# Altium PCB echOpen_HV+Pulser_Board.PcbDoc
Units mil, origin at the board's own origin, x right, y up, seen from the top; angles counter-clockwise.
Board outline 1402 x 3250 mil, 4 copper layers (Top, Plane 1, Plane 2, Bottom), stack 59.292 mil thick; 31 components, 14 nets, 112 pads, 196 vias.
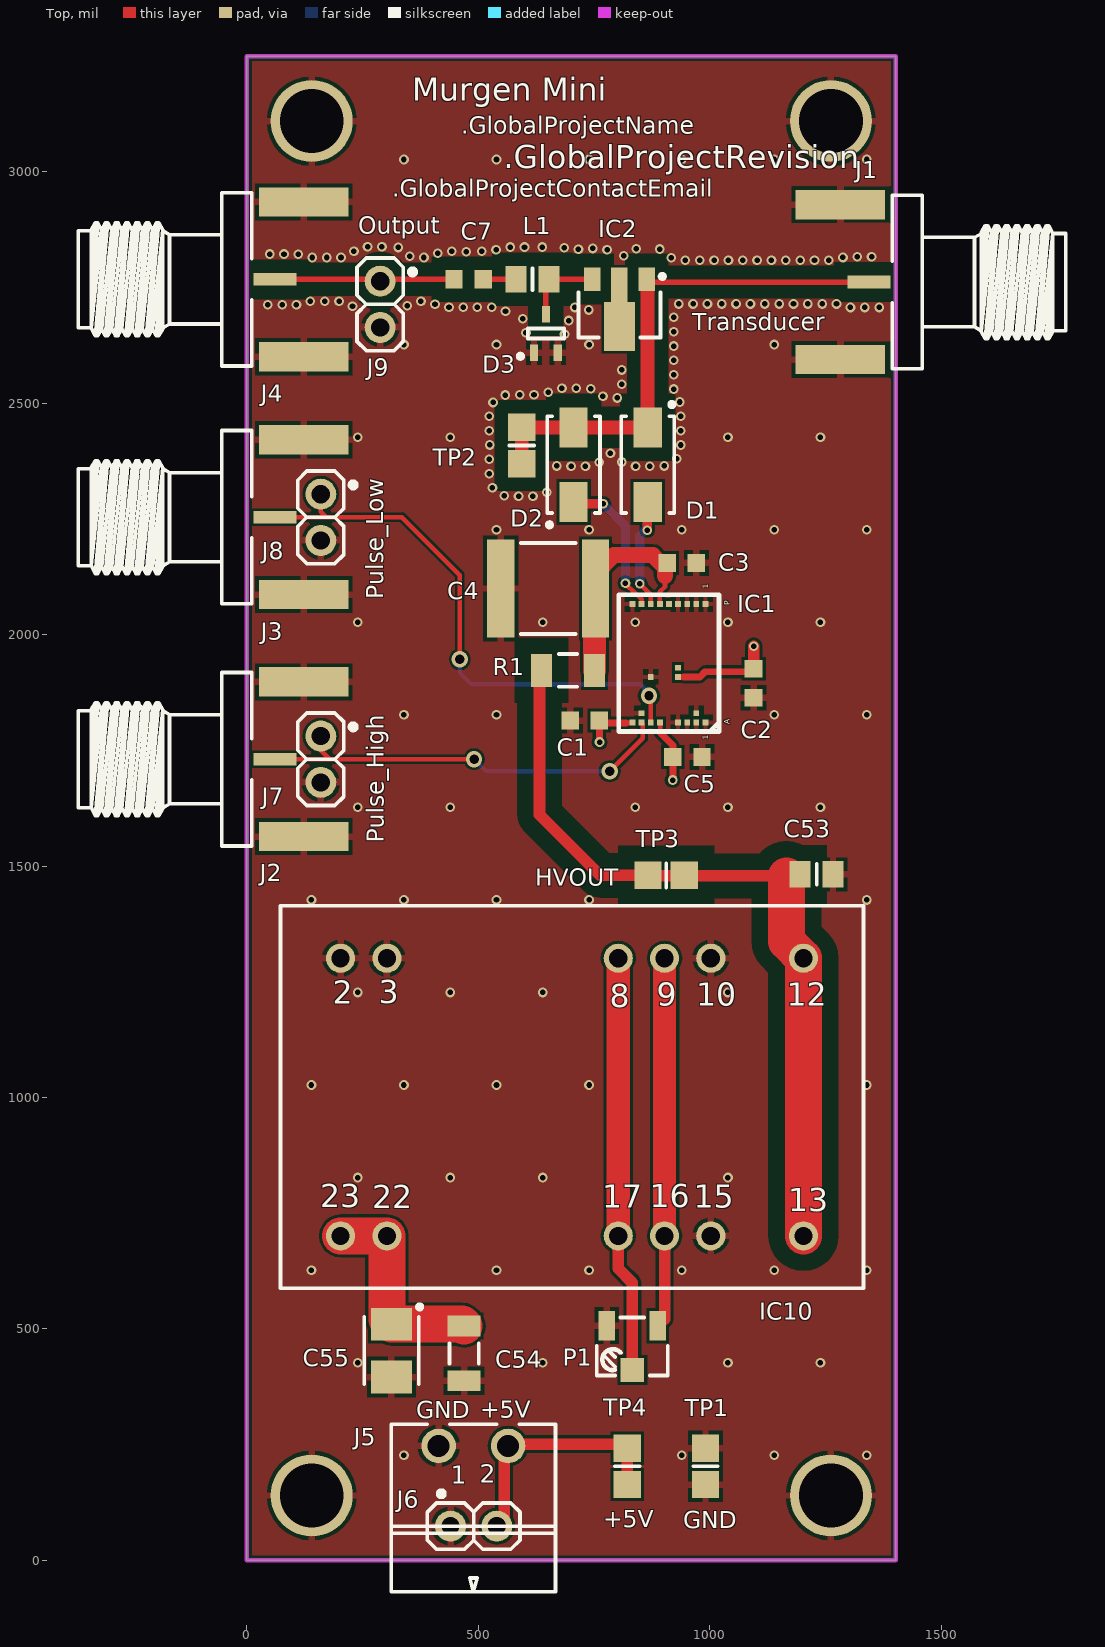
[diagram p0: Top view]
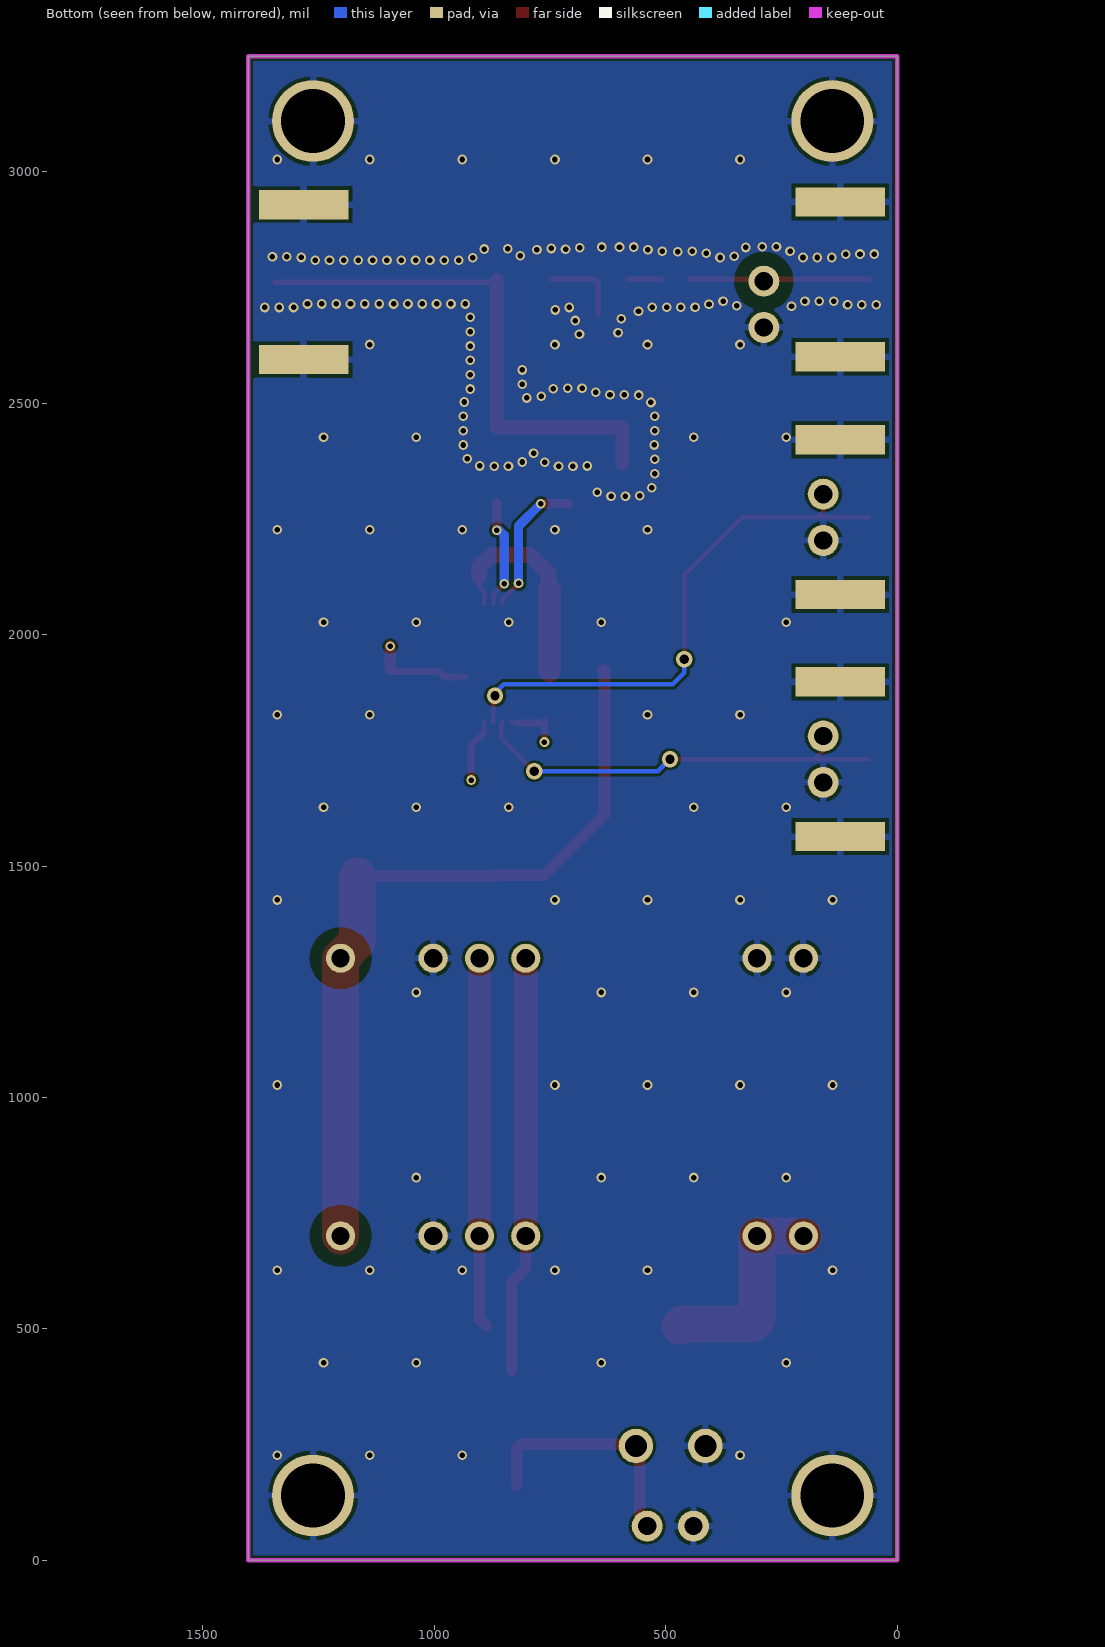
[diagram p1: Bottom view, seen from below]
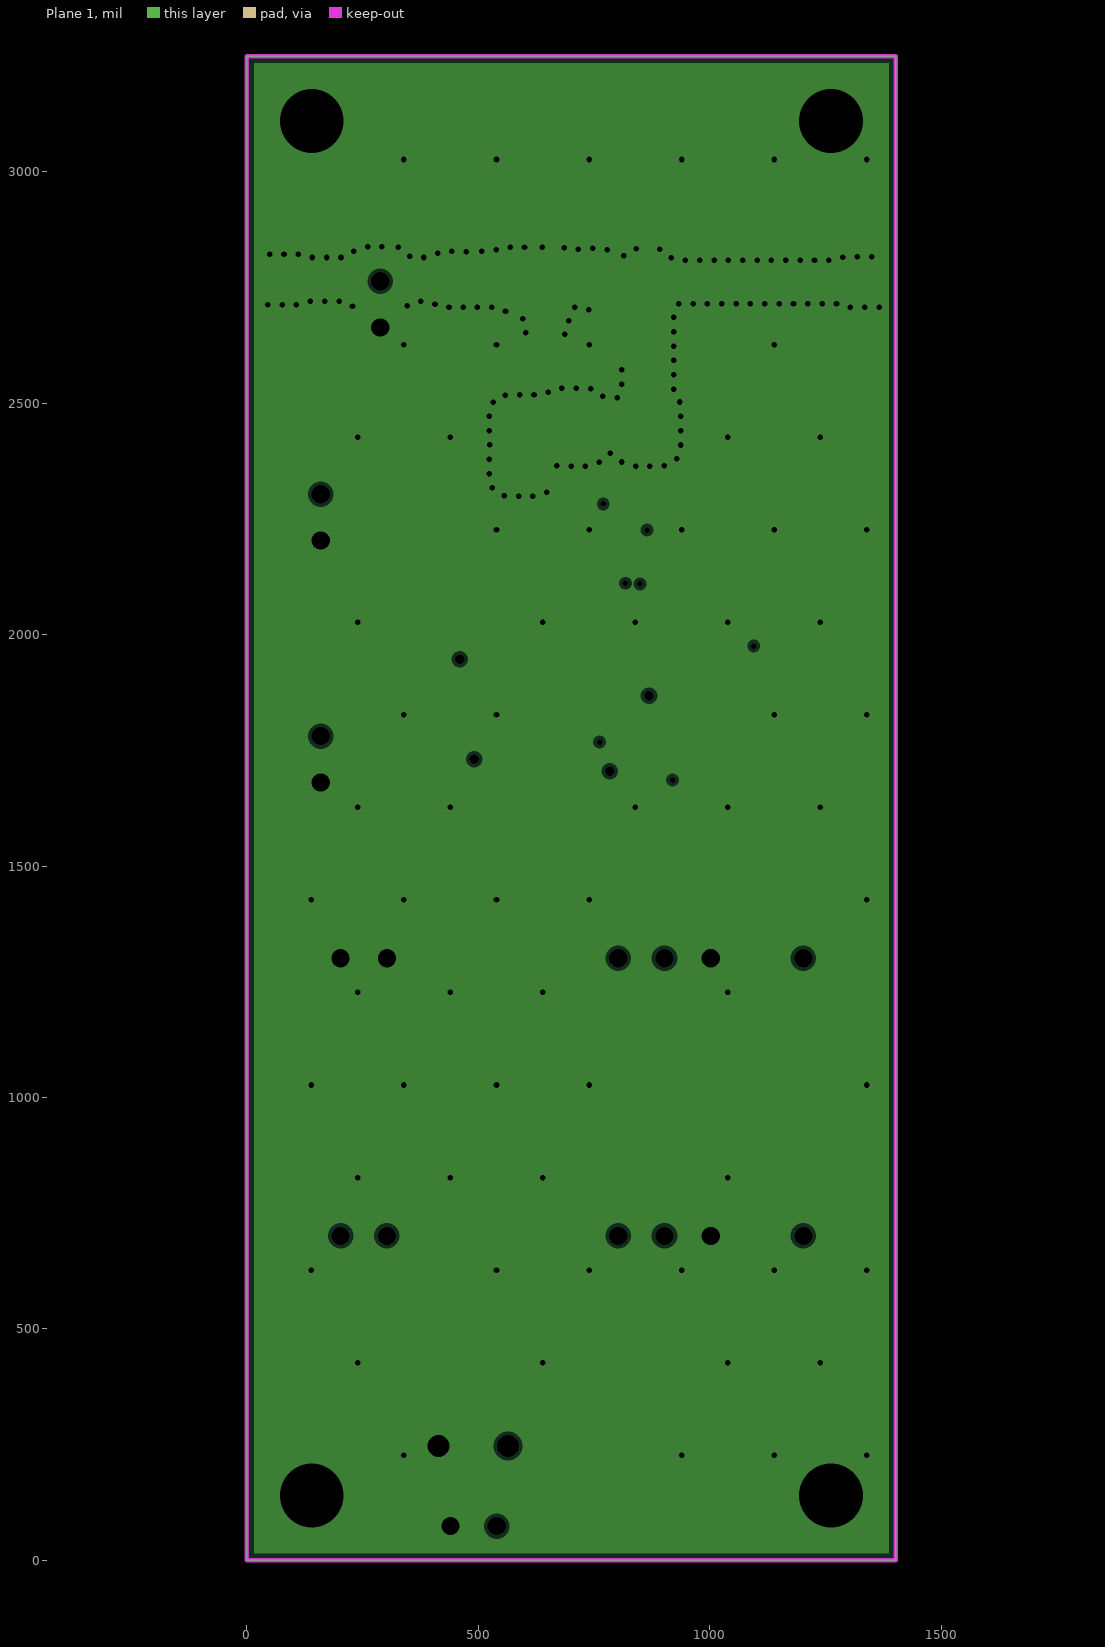
[diagram p2: Plane 1, clearances drawn from the general rule]
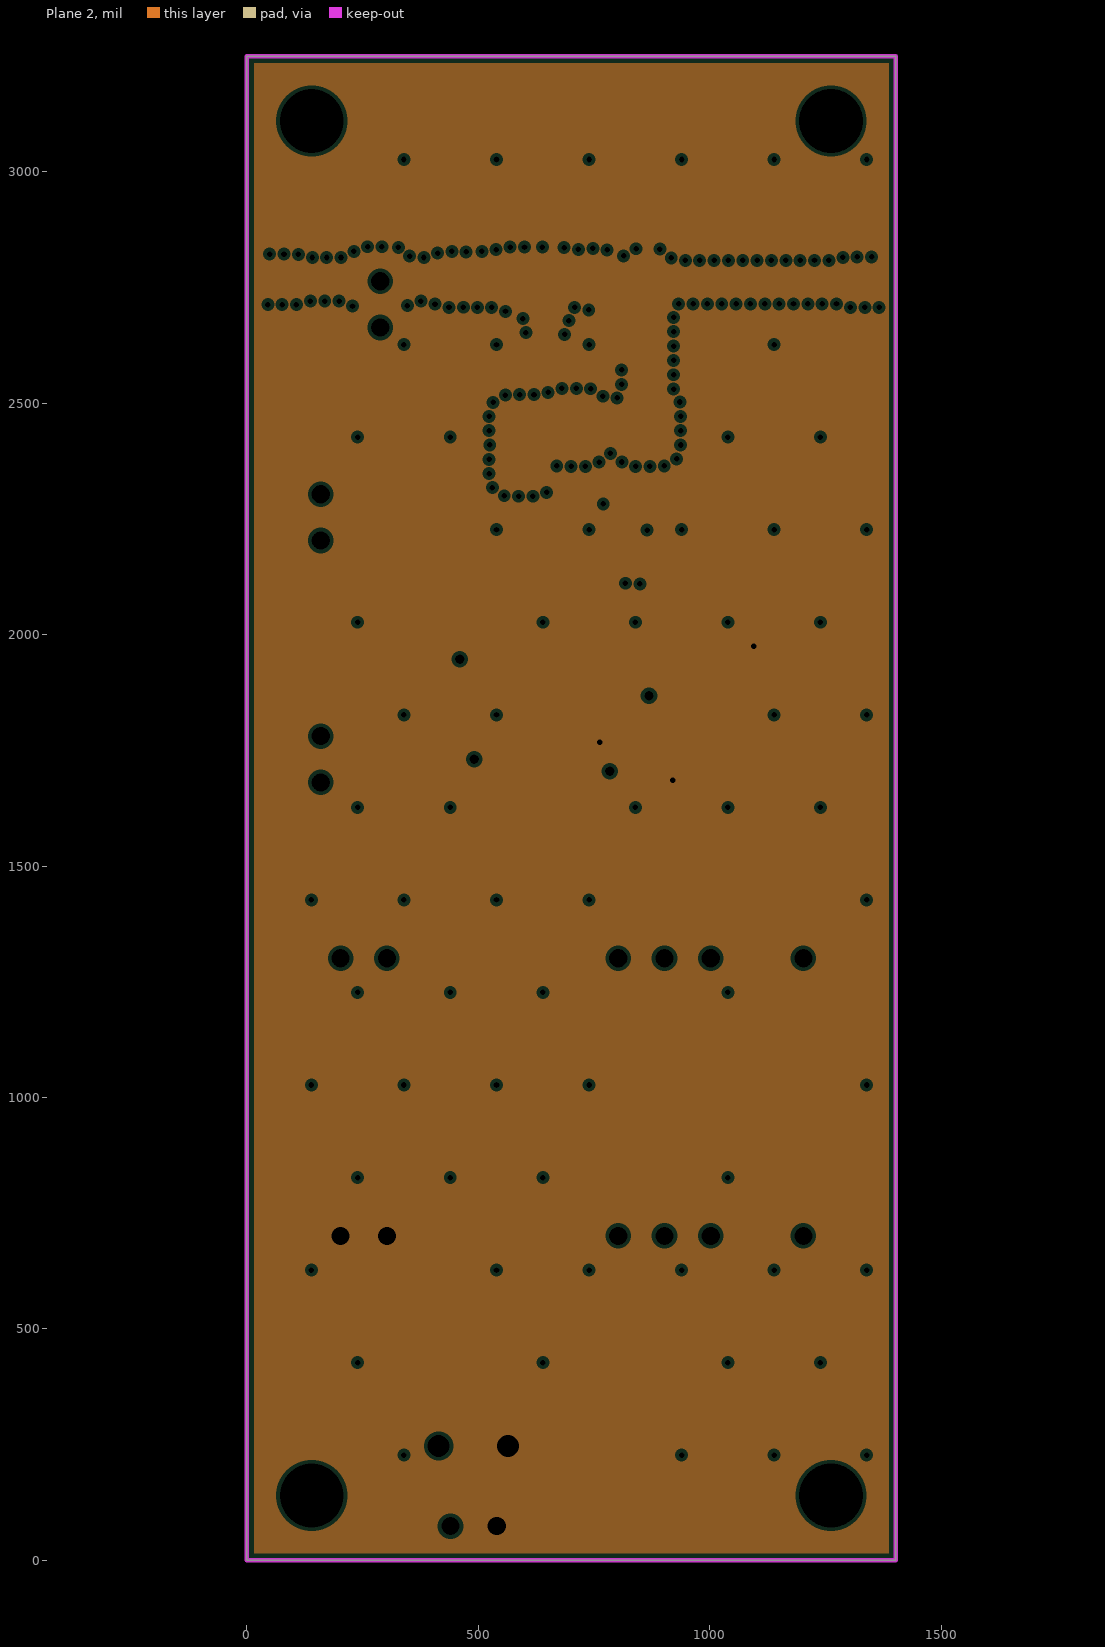
[diagram p3: Plane 2, clearances drawn from the general rule]
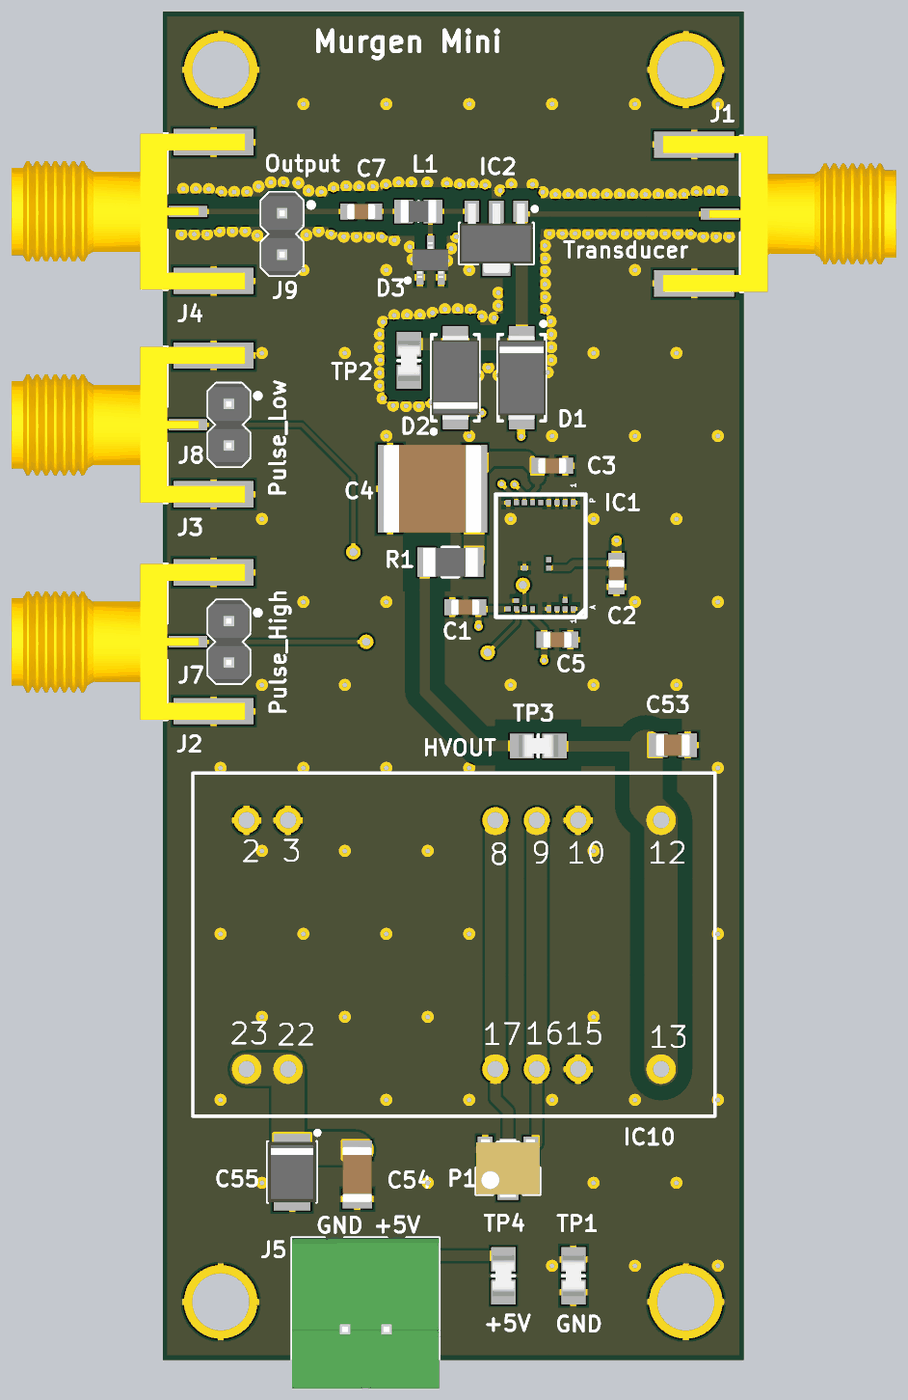
[diagram p4: 3D render of the assembled board from above, using the file's embedded part models]

## Layer stack, top to bottom
Top Solder: solder mask 0.4, Solder Resist, Dk 3.5
Top: signal copper 1.378
Dielectric1: core 7.874, FR-4, Dk 4.8
Plane 1: plane copper 0.709, net AGND
Dielectric2: prepreg 39.37, FR-4, Dk 4.8
Plane 2: plane copper 0.709, net VDD_5V
Dielectric3: core 7.874, FR-4, Dk 4.8
Bottom: signal copper 1.378
Bottom Solder: solder mask 0.4, Solder Resist, Dk 3.5

## Board outline
0,0 1402,0 1402,3250 0,3250

## Design rules (kind name [scope] priority, off if disabled: settings)
AssemblyTestPointUsage [All] p1 off:
AssemblyTestpoint [All] p1 off: testpointundercomponent=TRUE minsize=40 maxsize=100 preferedsize=60 minholesize=0 maxholesize=40 preferedholesize=32 testpointgrid=1 usegrid=TRUE gridtolerance=0.01 allowsidetop=TRUE allowsidebottom=TRUE
Clearance ClearanceHV [InNet('HVOUT') vs not InComponent('C53')] p1: gap=35
Clearance ClearanceRF [InNetClass('RF') and not InComponent('IC3') vs InNet('AGND') and not InComponent('IC3')] p2: gap=30
Clearance ClearanceViaPad [IsVia vs IsPad] p3: gap=6
Clearance ClearanceGNDpolygons [InPolygonClass('GNDpolygons')] p4: gap=6
Clearance [All] p5: gap=6
ComponentClearance ComponentClearance_Connectors [HasFootprint('HARWIN_M20-9990246') vs (HasFootprint('PHOENIX_1803277') OR HasFootprint('AMPHENOL_132357-11'))] p1: gap=0 collisioncheckmode=3 verticalgap=0 showdistances=FALSE
ComponentClearance [All] p2: gap=10 collisioncheckmode=3 verticalgap=10 showdistances=TRUE
FabricationTestPointUsage [All] p1 off: valid=0 allowmultiple=FALSE
FabricationTestpoint [All] p1 off: side=3 testpointundercomponent=TRUE minsize=40 maxsize=100 preferedsize=60 minholesize=0 maxholesize=40 preferedholesize=32 testpointgrid=1 allowsidetop=TRUE allowsidebottom=TRUE usegrid=TRUE gridtolerance=0.01
HoleSize [All] p1: absolutevalues=TRUE maxlimit=248.03 minlimit=11.81 maxpercent=80.000 minpercent=20.000
HoleToHoleClearance [All] p1: gap=12 allowstackedmicrovias=TRUE
MatchedLengths MatchedLengthsBits [InNetClass('BIT[1..12]')] p1: tolerance=1000 checknetsindiffpair=FALSE checkdiffpairvsdiffpair=TRUE checkxsignals=TRUE checkothers=TRUE
MatchedLengths MatchedLengthsDs [InNetClass('D[0..11]')] p2: tolerance=1000 checknetsindiffpair=FALSE checkdiffpairvsdiffpair=TRUE checkxsignals=TRUE checkothers=TRUE
MinimumAnnularRing [All] p1: minimumring=4
MinimumSolderMaskSliver [All] p1: minsoldermaskwidth=0.5
PlaneClearance [All] p1: clearance=8
PlaneConnect PlaneConnectVia [Isvia] p1: planeconnectstyle=Direct reliefexpansion=20 reliefentries=4 reliefconductorwidth=10 reliefairgap=10
PlaneConnect [All] p2: planeconnectstyle=Relief reliefexpansion=20 reliefentries=4 reliefconductorwidth=20 reliefairgap=10
PolygonConnect PolygonConnectBGA [All vs InComponent('IC1')] p1: connectstyle=Relief reliefconductorwidth=10 reliefentries=4 polygonreliefangle="90 Angle" airgapwidth=10
PolygonConnect PolygonConnectLittleAccessPads [All vs InComponent('IC9')] p2: connectstyle=Relief reliefconductorwidth=30 reliefentries=4 polygonreliefangle="90 Angle" airgapwidth=10
PolygonConnect PolygonConnectVia [IsVia] p3: connectstyle=Direct reliefconductorwidth=15.75 reliefentries=4 polygonreliefangle="90 Angle" airgapwidth=10
PolygonConnect PolygonConnectBigPads [(ObjectKind = 'Pad') And ((AsMM(PadXSize_AllLayers) > 10) Or (AsMM(PadYSize_AllLayers) > 10))] p4: connectstyle=Direct reliefconductorwidth=15.75 reliefentries=4 polygonreliefangle="90 Angle" airgapwidth=10
PolygonConnect PolygonConnectGeneral [All] p5: connectstyle=Relief reliefconductorwidth=15 reliefentries=4 polygonreliefangle="90 Angle" airgapwidth=8
RoutingVias [All] p1: holewidth=15 width=25 viastyle="Through Hole" minholewidth=12 minwidth=16 maxholewidth=50 maxwidth=56
SilkToSilkClearance SilkToSilkClearance_Header [HasFootprint('HDR1X2') vs HasFootprint('PHOENIX_1911017')] p1: silktosilkclearance=0
SilkToSilkClearance [All] p2: silktosilkclearance=1
SilkToSolderMaskClearance SilkToSolderMaskClearance_Header [HasFootprint('HDR1X2')] p1: minsilkscreentomaskgap=0 clearancetoexposedcopper=TRUE
SilkToSolderMaskClearance SilkscreenOverComponentPads [IsPad] p2: minsilkscreentomaskgap=2 clearancetoexposedcopper=FALSE
SolderMaskExpansion [All] p1: expansion=4
Width Width_RF_Class [InNetClass('RF')] p1: maxlimit=31.47 minlimit=12.33 preferedwidth=12.33 impedancedriven=TRUE minimp=20.000000 maximp=50.000000 favimp=50.000000
Width WidthTechnology [All] p2: maxlimit=150 minlimit=6 preferedwidth=10
18 further rules are at their usual default settings.

## Classes and differential pairs
net class RF: NetC7_1 NetC7_2 NetD3_3 ULTRASOUND_TRANSDUCER

## Components (designator, comment, footprint, x,y, rotation, side; value= is the part's Value field where it differs from the comment)
C1 "100nF" CAPC1608X87N 730,1814.5 r0 top
C2 "100nF" CAPC1608X87N 1095,1895.29 r90 top
C3 "100nF" CAPC1608X87N 939.8,2155.18 r180 top
C4 "1uF" CAPC5650X165N 651,2099.91 r0 top
C5 "100nF" CAPC1608X87N 952,1736 r180 top
C7 "100nF" CAPC1608X87N 479,2768 r180 top
C53 "4.7nF" CAPC2012X110N 1231,1482 r180 top
C54 "47uF" CAPC3216X180N 469.28,447 r90 top
C55 "10uF" CAPMP3528X210N 312.28,453 r270 top
D1 "ES1D" DIOM5027X244N 866,2367.5 r270 top
D2 "ES1D" DIOM5027X244N 706,2367.5 r90 top
D3 "BAT64-04W" SOT65P210X100-3N 646,2651 r90 top
IC1 "HV7360LA-G" HV7360 912,1938.5 r90 top
IC2 "MD0100N8-G" SOT89 805,2691 r270 top
IC10 "R05-100B" PWS_RECOM_R05-100B 702.47,1001 r0 top
J1 "Transducer" AMPHENOL_132357-11 1344,2762 r180 top
J2 "SMA" AMPHENOL_132357-11 61,1731 r0 top
J3 "SMA" AMPHENOL_132357-11 61,2254 r0 top
J4 "SMA" AMPHENOL_132357-11 61,2768 r0 top
J5 "PHOENIX_1803277" PHOENIX_1803277 489.38,247 r0 top
J6 "Header 2" HARWIN_M20-9990246 440,73.77 r0 top
J7 "Header 2" HARWIN_M20-9990246 159.63,1781 r270 top
J8 "Header 2" HARWIN_M20-9990246 159.63,2303.78 r270 top
J9 "Header 2" HARWIN_M20-9990246 288,2764 r270 top
L1 "75R@100MHz" INDC2012X105N 617,2768.36 r0 top
P1 "5k" TRIM_BOURNS_3223W 833,462 r180 top
R1 "4k7" RESC3216X65N 694,1922.95 r180 top
TP1 "Test Point" NICOMATIC_C12000B 991,203 r90 top
TP2 "Test Point" NICOMATIC_C12000B 594,2409 r90 top
TP3 "Test Point" NICOMATIC_C12000B 906,1480 r180 top
TP4 "Test Point" NICOMATIC_C12000B 822,203 r270 top

## Footprints (in the part's own frame and the unit in brackets; to place one, negate y for a bottom-side part, rotate by r counter-clockwise, add the part's x,y. Pads: shape width x height; smd on the part's side, far side on the other; paste and mask are expansions set on the pad)
AMPHENOL_132357-11 [mm] "SMA End Launch Jack for 1.58mm PCB, 50 Ohm, Flat Tab Contact"
  rect 2.35x0.7 smd: 1(0,0)
  rect 4.9x1.6 smd: 2(1.575,4.25) 2(1.575,-4.25)
  rect 4.9x1.6 smd far side: 2(1.575,4.25) 2(1.575,-4.25)
  silkscreen extent -10.81,-4.76 -1.28,4.76, body extent -10.8,-4.76 3.48,4.76, height 4.08
CAPC1608X87N [mm] "Chip Capacitor, Body 1.6x0.8mm IPC Medium Density"
  rect 0.95x1 smd: 1(-0.8,0) 2(0.8,0)
  body extent -0.87,-0.47 0.88,0.48, height 0.87
CAPC2012X110N [mm] "Chip Capacitor, Body 2.0x1.25mm, IPC Medium Density"
  rect 1.15x1.45 smd: 1(-0.9,0) 2(0.9,0)
  silkscreen extent 0,-0.58 0,0.58, body extent -1.05,-0.67 1.05,0.68, height 1.1
CAPC3216X180N [mm] "Chip Capacitor, Body 3.2x1.6mm, IPC Medium Density"
  rect 1.15x1.8 smd: 1(-1.5,0) 2(1.5,0)
  silkscreen extent -0.55,-0.8 0.55,0.8, body extent -1.7,-0.9 1.7,0.9, height 1.8
CAPC5650X165N [mm] "Chip Capacitor, 2-Leads,Body 5.6x5mm, IPC Medium Density"
  rect 1.5x5.4 smd: 1(-2.6,0) 2(2.6,0)
  silkscreen extent -1.5,-2.5 1.5,2.5, body extent -3,-2.7 3,2.7, height 1.65
CAPMP3528X210N [mm] "Capacitor, Polarized, Molded  Body 3.5x2.8mm, IPC Medium Density"
  rect 1.8x2.25 smd: 1(-1.45,0) 2(1.45,0)
  silkscreen extent -2.52,-1.5 1.85,1.68, body extent -1.85,-1.5 1.85,1.5, height 2.1
DIOM5027X244N [mm] "DO-214-AC/SMA  Molded Diode, Body 5.0x2.7mm, IPC Medium Density"
  rect 2.2x1.55 smd: 1(-2.05,0) 2(2.05,0)
  silkscreen extent -3.42,-1.45 2.65,1.45, body extent -2.6,-1.45 2.6,1.45, height 2.44
HARWIN_M20-9990246 [mm] "2 Contacts, Pitch 2.54mm - Male Vertical Single row Pc tail"
  round 1.7 hole 1: 1(0,0) 2(2.54,0)
  silkscreen extent -1.27,-1.27 3.81,1.93, body extent -1.27,-1.27 3.81,1.27, height 8.64
HV7360 [mm] "High Speed, ±100V 2.5A,  Two or Three Level Ultrasound Pulser"
  rect 0.32x0.32 smd mask+0.075: A1(-3.25,-2) A2(-3.25,-1.5) A3(-3.25,-1) A4(-3.25,-0.5) A6(-3.25,0.5) A7(-3.25,1) A8(-3.25,1.5) A9(-3.25,2) B2(-2.75,-1.5) B8(-2.75,1.5) F4(-0.75,-0.5) F7(-0.75,1) G4(-0.25,-0.5) P1(3.25,-2) P2(3.25,-1.5) P3(3.25,-1) P4(3.25,-0.5) P5(3.25,0) P6(3.25,0.5) P7(3.25,1) P8(3.25,1.5) P9(3.25,2)
  silkscreen extent -3.75,-2.75 3.75,2.75
INDC2012X105N [mm] "Chip Inductor, EIA 0805, Metric 2012, Body 2.0x1.25mm, IPC Medium Density"
  rect 1.15x1.45 smd: 1(-0.9,0) 2(0.9,0)
  silkscreen extent 0,-0.6 0,0.6, body extent -1.1,-0.7 1.1,0.7, height 1.1
NICOMATIC_C12000B [mm] "Surface Mount PCB Test Point"
  rect 1.5x1.5 smd: 1(-1,0) 1(1,0)
  silkscreen extent 0,-0.67 0,0.67, body extent -1.25,-0.67 1.25,0.68, height 1.5
PHOENIX_1803277 [mm] "PHOENIX MC Serie, Pitch 3.81mm, 8A, 160V, 2 Positions Right Angled Header"
  round 1.9 hole 1.2: 1(-1.905,0) 2(1.905,0)
  silkscreen extent -4.51,-8 4.51,1.2, body extent -4.5,-8 4.5,1.3, height 7.25
PWS_RECOM_R05-100B [mm] "55-135V 5W Power Supply, Body 32x21mm"
  round 1.6 hole 1: 2(-12.7,7.62) 3(-10.16,7.62) 8(2.54,7.62) 9(5.08,7.62) 10(7.62,7.62) 12(12.7,7.62) 13(12.7,-7.62) 15(7.62,-7.62) 16(5.08,-7.62) 17(2.54,-7.62) 22(-10.16,-7.62) 23(-12.7,-7.62)
  silkscreen extent -16,-10.5 16,10.5, body extent -16,-10.5 16,10.5, height 9.4
RESC3216X65N [mm] "Chip Resistor, EIA 1206, Metric 3216, Body 3.2x1.6mm, IPC Medium Density"
  rect 1.15x1.8 smd: 1(-1.45,0) 2(1.45,0)
  silkscreen extent -0.5,-0.9 0.5,0.9, body extent -1.67,-0.87 1.68,0.88, height 0.65
SOT65P210X100-3N [mm] "SOT323, 0.65mm pitch; 3 pin, 1.25mm W X 2.00mm L, IPC Medium Density"
  rect 0.9x0.45 smd: 1(-1.05,0.65) 2(-1.05,-0.65) 3(1.05,0)
  silkscreen extent -1.37,-1 0.28,1.52, body extent -1.1,-1.1 1.1,1.1, height 1
SOT89 [mm] "SOT89-3, 3-Leads, Body 2.48x4.5mm"
  rect 1.3x0.9 smd: 1(-1.965,1.5) 3(-1.965,-1.5)
  rect 1.9x0.9 smd: 2(-1.665,0)
  rect 2.7x1.7 smd: 2(0.635,0)
  silkscreen extent -2.24,-2.25 1.24,2.48, body extent -2.44,-2.25 1.81,2.25, height 1.6
TRIM_BOURNS_3223W [mm] "Bourns 3223W Trimming Potentiometer"
  rect 0.9x1.6 smd: 1(-1.4,-1.14) 3(1.4,-1.14)
  rect 1.3x1.3 smd: 2(0,1.29)
  silkscreen extent -1.95,-1.59 1.95,1.59, body extent -1.95,-1.81 1.95,1.81, height 4.16

## Part data
C1 C2 C3 C5 C7: library part CC0603_100NF_50V_10%_X7R, "Non-polarised capacitor"
C4: library part CC2220_1UF_200V_10%_X7R, "Non-polarised capacitor"
C53: library part CC0805_4.7NF_250V_10%_X7R, "Non-polarised capacitor"
C54: library part CC1206_47UF_25V_20%_X5R, "Non-polarised capacitor"
C55: library part CTE3528-21_10UF_16V_10%_LESR0800, "Polarised capacitor"
D1 D2: "Diode"
D3: "Serial Diode"
IC2: "3-Ultra-Sound HV Switch 1=A 2=COM 3=B"
IC10: "Power Supply"
J1 J2 J3 J4: library part AMPHENOL_132357-11
J5: "Connector 2 Male"
J6 J7 J8 J9: library part HARWIN_M20-9990246_a, "Connector 2 Male"
L1: library part IND0805_MURATA_BLM21BB750SN1D, "Inductor"
P1: library part TRIM_11T_5K_BOURNS_3223W-1-502E, "Trimming Potentiometer"
R1: library part R1206_4K7_1%_0.25W_100PPM, "Resistor - 1%"
TP1 TP2 TP3 TP4: library part NICOMATIC_C12000B

## Free pads (board coordinates)
  round 177.17 hole 137.8: 0(140,140) 1(1262,140) 2(1262,3110) 3(140,3110)

## Via types
v1: diameter 21, hole 12, Top to Bottom, 192 vias
v2: diameter 35, hole 20, Top to Bottom, 4 vias

## Nets (pads, with @x,y where several pads share a name; then routed paths per layer and width w, separated by ;. In a path a pad name is that pad's centre, name@x,y a point inside that pad or via, vN(x,y) a via of type N, cw(c..) or ccw(c..) an arc to the next point about the centre after c; other vN are vias at no path point)
AGND: C1.1 C2.1 C3.1 C4.1 C5.1 C53.1 C54.1 C55.2 D3.1 D3.2 IC1.A1 IC1.A2 IC1.A3 IC1.A4 IC1.B2 IC1.B8 IC1.F7 IC1.P1 IC1.P2 IC1.P3 IC1.P4 IC1.P9 IC10.2 IC10.3 IC10.10 IC10.15 J1.2 J2.2 J3.2 J4.2 J5.1 J6.1 J7.2 J8.2 J9.2 P1.3 pad.0 pad.1 pad.2 pad.3 TP1.1 | length 7.5
  Top w50: IC10.2@202.47,1293.53 IC10.2
  other v1: 339.38,227 939.38,227 1139.38,227 1339.38,227 239.38,427 639.38,427 1039.38,427 1239.38,427 139.38,627 539.38,627 739.38,627 939.38,627 1139.38,627 1339.38,627 239.38,827 439.38,827 639.38,827 1039.38,827 139.38,1027 339.38,1027 539.38,1027 739.38,1027 1339.38,1027 239.38,1227 439.38,1227 639.38,1227 1039.38,1227 139.38,1427 339.38,1427 539.38,1427 739.38,1427 1339.38,1427 239.38,1627 439.38,1627 839.38,1627 1039.38,1627 1239.38,1627 339.38,1827 539.38,1827 1139.38,1827 1339.38,1827 239.38,2027 639.38,2027 839.38,2027 1039.38,2027 1239.38,2027 539.38,2227 739.38,2227 939.38,2227 1139.38,2227 1339.38,2227 587.03,2299.25 618.03,2299.25 556.05,2300.36 647.85,2307.72 530.47,2317.88 523.62,2348.12 700.52,2364.05 731.52,2364.05 839.81,2364.05 870.81,2364.05 669.53,2364.83 901.8,2364.74 761.25,2372.83 810.2,2373.25 523.62,2379.12 928.64,2380.25 785.56,2392.06 524.77,2410.1 937.36,2409.99 239.38,2427 439.38,2427 1039.38,2427 1239.38,2427 523.62,2441.07 937.36,2440.99 523.62,2472.07 937.36,2471.99 531.88,2501.95 935.61,2502.95 800.04,2511.75 769.25,2515.38 558.44,2517.95 589.43,2518.75 620.43,2518.75 651.01,2523.78 922.14,2530.87 680.8,2532.36 711.8,2532.36 742.79,2531.53 809.86,2541.16 922.14,2561.87 809.86,2572.16 922.14,2592.87 922.14,2623.87 339.38,2627 539.38,2627 739.38,2627 1139.38,2627 686.46,2649.27 602.9,2652.72 922.14,2654.87 695.71,2678.86 596.29,2683.01 922.14,2685.87 558.84,2698.98 738.73,2701.92 436.65,2707.47 498.02,2707.47 529.02,2707.47 708.19,2707.24 1304.19,2707.37 1335.19,2707.37 1366.19,2707.37 467.65,2707.66 228.22,2710.07 346.66,2711.21 45.08,2713.37 76.08,2713.37 107.08,2713.37 406.44,2714.43 933.1,2714.86 964.1,2714.86 995.1,2714.86 1026.1,2714.86 1057.1,2714.86 1088.1,2714.86 1119.1,2714.86 1150.1,2714.86 1181.1,2714.86 1212.1,2714.86 1243.1,2714.86 1274.1,2714.86 137.16,2720.86 168.16,2720.86 199.16,2720.86 376.12,2720.86 947.5,2809.14 978.5,2809.14 1009.5,2809.14 1040.5,2809.14 1071.5,2809.14 1102.5,2809.14 1133.5,2809.14 1164.5,2809.14 1195.5,2809.14 1226.5,2809.14 1257.5,2809.14 141.34,2815.14 172.34,2815.14 203.34,2815.14 382.59,2815.14 916.98,2814.59 1287.87,2815.33 1318.84,2816.63 1349.84,2816.63 351.74,2818.17 814.26,2818.68 111.13,2822.12 49.14,2822.63 80.14,2822.63 412.11,2824.61 473.84,2827.53 231.31,2828.5 442.86,2828.53 507.57,2828.53 538.36,2832.17 778.24,2831.75 716.45,2832.91 892.34,2833.41 841.15,2834.12 747.39,2834.8 685.64,2836.36 327.1,2836.99 260.69,2838.38 291.69,2838.38 568.85,2837.75 599.85,2837.75 638.37,2837.75 339.38,3027 539.38,3027 739.38,3027 939.38,3027 1139.38,3027 1339.38,3027
HVOUT: C53.2 IC10.12 IC10.13 R1.2 TP3.1 | length 1698.2
  Top w25: R1.2 632.3,1922.95 632.3,1610.7 763,1480 866.63,1480 867.63,1479 1166,1479
  Top w80: 1166,1479 1166,1337.47 IC10.12 1202.47,1225 1202.47,1166 1202.47,1100 1202.47,935 IC10.13
NetC3_2: C3.2 C4.2 IC1.P6 R1.1 | length 471.8
  Top w10: IC1.P6 892.32,2092.51 903.5,2103.7 903.5,2127.5
  Top w25: C4.2@751.09,2097.64 C4.2
  Top w35: C4.2 753.36,2132.36 793,2172 877.3,2172 903.5,2145.79 903.5,2127.5
  Top w50: R1.1 C4.2@751.09,2097.64
NetC7_1: C7.1 L1.1 | length 70.7
  Top w12.33: C7.1@510.86,2768.36 L1.1
NetC7_2: C7.2 J4.1 J9.1 | length 386.5
  Top w12.33: J4.1 C7.2
NetD1_2: D1.2 IC1.P7 | length 238.8
  Top w10: v1(849,2109.96) 872.63,2086.33 IC1.P7
  Top w20: v1(865,2226) 865.05,2226.05 D1.2@865.05,2285.83
  Bottom w20: v1(849,2109.96) 849,2215 860,2226 v1(865,2226)
NetD2_1: D2.1 IC1.P8 | length 311.2
  Top w10: v1(818,2111.26) 818,2110.55 840.09,2088.46 840.8,2088.46 852.95,2076.31 IC1.P8
  Top w20: D2.1@709.94,2282.85 v1(769.98,2282.85)
  Bottom w20: v1(769.98,2282.85) 818,2234.83 v1(818,2111.26)
NetD3_3: D3.3 IC2.3 L1.2 | length 172.2
  Top w12.33: D3.3 646,2761.93 L1.2 IC2.3
NetIC1_A7: IC1.A7 J3.1 J8.1 | length 1209.7
  Top w10: J3.1 171,2254 ; J8.1@144.63,2298.78 159.47,2283.93 159.47,2265.53 171,2254 ; v2(460,1947) 460,2129 335,2254 171,2254 ; v2(869,1868) 872.63,1864.37 IC1.A7
  Bottom w10: v2(460,1947) 460,1918 485,1893 850,1893 869,1874 v2(869,1868)
NetIC1_A8: IC1.A8 J2.1 J7.1 | length 937.1
  Top w10: J2.1 179,1731 ; J7.1@144.63,1784 144.63,1765.37 179,1731 ; v2(491,1731) 179,1731 ; v2(783.97,1705) 855.33,1776.36 855.33,1808.16 IC1.A8
  Bottom w10: v2(491,1731) 517,1705 v2(783.97,1705)
NetIC10_8: IC10.8 IC10.17 P1.2 | length 902.4
  Top w25: IC10.17 802.47,630.53 833,600 P1.2
  Top w50: IC10.17 IC10.8
NetIC10_9: IC10.9 IC10.16 P1.1 | length 800.1
  Top w25: P1.1 902.47,521.24 IC10.16
  Top w50: IC10.16 IC10.9
ULTRASOUND_TRANSDUCER: D1.1 D2.2 IC2.1 J1.1 TP2.1 | length 1151.3
  Top w12.33: IC2.1 866,2766.42 870.42,2762 J1.1
  Top w30: TP2.1@594,2369.63 594,2448.04 594.17,2448.2 D1.1 IC2.1@866,2766.42
VDD_5V: C1.2 C2.2 C5.2 C54.2 C55.1 IC1.A6 IC1.A9 IC1.F4 IC10.22 IC10.23 J5.2 J6.2 TP4.1 | length 1461
  Top w10: 820.73,1809.5 832.21,1809.5 IC1.A9 ; IC1.A6 893,1809.86 893,1789 ; IC1.F4 942.89,1908.97 943,1908.85
  Top w15: C1.2 C1.2@761.5,1809.5 ; v1(762,1768) 761.5,1768.5 C1.2@761.5,1809.5 ; 820.73,1809.5 C1.2@761.5,1809.5 ; 893,1789 893,1788.45 920.5,1760.94 C5.2 920.5,1686.5 v1(920,1686) ; 943,1908.85 979.06,1908.85 990.2,1919.99 C2.2@1095.24,1919.99
  Top w25: J6.2@539.38,71 539.38,73.77 555.9,90.29 555.9,251 813.37,251 822,242.37 TP4.1@822,163.63 ; C2.2 1095.24,1927.03 v1(1095.24,1975.24)
  Top w80: IC10.23 IC10.22 302.47,519.9 C55.1 465.25,510.09 C54.2
pads on no net: IC1.G4 IC1.P5 IC2.2

## Polygon pours and split planes (outlines as drawn)
AGND on Bottom "Bottom-AGND" (solid, pour order 8): 0,0 1402,0 1402,3250 0,3250
AGND on Top "Top-AGND" (solid, pour order 6): 0,0 1402,0 1402,3250 0,3250
AGND on Plane 1 (split plane): 1386.93,15.07 15.07,15.07 15.07,3234.93 1386.93,3234.93
VDD_5V on Plane 2 (split plane): 1386.93,15.07 15.07,15.07 15.07,3234.93 1386.93,3234.93

## Keep-outs
Keep-Out Layer:
  the board outline again, w10

## Silkscreen, mask and mechanical layers (free items; w line width, h text height)
Top Overlay:
  text "Murgen Mini" at 357,3154 h50
  text ".GlobalProjectName" at 463,3083 h37
  text ".GlobalProjectRevision" at 555,3008 h50
  text ".GlobalProjectContactEmail" at 313.76,2946 h37
  text "Output" at 241,2866 h37
  text "Transducer" at 962,2658 h37
  text "Pulse_Low" at 294.97,2076.31 h37 r90
  text "Pulse_High" at 296,1550 h37 r90
  text "HVOUT" at 623,1458 h37
  text "+5V" at 504,308 h37
  text "GND" at 366,307 h37
  text "+5V" at 770.36,71 h37
  text "GND" at 943,69 h37
Outline:
  lines w10: -2319.88,3852.56 2124.31,3852.56 2124.31,3628.07 ; -2319.88,4054.33 2124.31,4054.33 2124.31,3830.28 ; 706.99,3628.07 706.99,3852.56 ; 2124.31,4054.25 3146.95,4054.25 ; -2319.88,3628.07 3147.94,3628.07 3147.94,4338.7 -2319.88,4338.7 -2319.88,3628.07 ; 0,0 1402,0 1402,3250 0,3250 0,0
  text ".GlobalProjectName" at -1856.98,4138.9 h118.11
  text "Project:" at -2261.77,4132.64 h47.24
  text ".GlobalProjectDesigner" at -1956.39,3915.47 h80
  text ".GlobalProjectLink" at 791.64,3915.47 h80
  text "Designer:" at -2261.77,3912.52 h47.24
  text "More info:" at 405.81,3912.52 h47.24
  text ".GlobalProjectRevision" at 2360.54,3706.81 h196.85
  text ".Pcb_File_Name_No_Path" at -1694.58,3704.21 h80
  text "PCB file name:" at -2261.77,3703.15 h47.24
  text ".Print_Date" at 1302.21,3687.39 h80
  text "Rev:" at 2203.06,3687.39 h47.24
  text "Revision date:" at 783.51,3683.47 h47.24
Dimensions:
  lines w7.87: -3617.93,692.47 -2905.93,692.47 ; -3614.93,1009.47 -2902.93,1009.47 ; -3614.93,1763.47 -2902.93,1763.47 ; -3613.93,1460.47 -2901.93,1460.47 ; -3608.93,1898.47 -2896.93,1898.47
  lines w10: -3654.05,418.21 -2703.05,418.21 -2703.05,2047.47 -3654.05,2047.47 -3654.05,418.21
  text "BUILD STATISTICS" at -3604.93,1929.47 h60
  text "GENERAL" at -3612.93,1783.47 h40
  text ".Net_Count" at -3231.93,1700.47 h40
  text "NETS" at -3609.93,1698.47 h35
  text ".Component_Count" at -3231.93,1618.47 h40
  text "COMPONENTS" at -3608.93,1617.47 h35
  text "PRIMITIVES" at -3611.93,1480.47 h40
  text ".Fill_Count" at -3231.93,1396.47 h40
  text "FILLS" at -3608.93,1395.47 h35
  text ".Track_Count" at -3231.93,1315.47 h40
  text "TRACKS" at -3608.93,1313.47 h35
  text ".String_Count" at -3231.93,1233.47 h40
  text "STRINGS" at -3608.93,1231.47 h35
  text ".Arc_Count" at -3231.93,1150.47 h40
  text "ARC'S" at -3608.93,1148.47 h35
  text "LANDS" at -3612.93,1029.47 h40
  text ".Pad_Count" at -3231.93,945.47 h40
  text ".Pad_Count" at -3231.93,945.47 h40
  text "PADS" at -3608.93,943.47 h35
  text ".Via_Count" at -3231.93,863.47 h40
  text "VIA'S" at -3607.93,862.47 h35
  text "PRINT SCALE" at -3615.93,712.47 h40
  text ".Print_Scale" at -3233.93,627.47 h40
  text "SCALE" at -3610.93,626.47 h35
  text ".Print_Date" at -3233.93,546.47 h40
  text "PRINT DATE" at -3609.93,545.47 h35
  text ".Print_Time" at -3232.93,465.47 h40
  text "PRINT TIME" at -3608.93,464.47 h35
Frame:
  the board outline again, w10

## Dimensions
0,0 to 1402,0 on Drill Drawing
0,3250 to 0,0 on Drill Drawing

## Text inside footprints (layer, text, board x,y; h text height)
IC1: Top Overlay "P" at 1042.91,2063.5 h11.81 r90; Top Overlay "1" at 996.65,2099.91 h11.81 r90; Top Overlay "1" at 996.65,1773.14 h11.81 r90; Top Overlay "A" at 1042.91,1806.61 h11.81 r90
IC10: Top Overlay "3" at 284.36,1203.36 h50; Top Overlay "2" at 185.94,1202.38 h50; Top Overlay "16" at 870.58,763.2 h50; Top Overlay "15" at 966.06,762.22 h50; Top Overlay "8" at 783.97,1195.29 h50; Top Overlay "9" at 885.35,1198.24 h50; Top Overlay "10" at 970.98,1198.24 h50; Top Overlay "12" at 1166.84,1198.24 h50; Top Overlay "13" at 1169.8,754.35 h50; Top Overlay "17" at 768.22,761.24 h50; Top Overlay "22" at 271.17,760.25 h50; Top Overlay "23" at 157.99,763.2 h50; 3D Bot "3" at 284.36,1203.36 h50; 3D Bot "2" at 185.94,1202.38 h50; 3D Bot "16" at 870.58,763.2 h50; 3D Bot "15" at 966.06,762.22 h50; 3D Bot "8" at 783.97,1195.29 h50; 3D Bot "9" at 885.35,1198.24 h50; 3D Bot "10" at 970.98,1198.24 h50; 3D Bot "12" at 1166.84,1198.24 h50; 3D Bot "13" at 1169.8,754.35 h50; 3D Bot "17" at 768.22,761.24 h50; 3D Bot "22" at 271.17,760.25 h50; 3D Bot "23" at 157.99,763.2 h50
J5: Top Overlay "2" at 503,168 h39.37; Top Overlay "1" at 441,165 h39.37